# Altium PCB PCB1.PcbDoc
Units mil, origin at the board's own origin, x right, y up, seen from the top; angles counter-clockwise.
Board outline 6830 x 4200 mil, 2 copper layers (Top Layer, Bottom Layer); 64 components, 50 nets, 169 pads, 13 vias.
Unrouted connection lines stored in the file: 2.
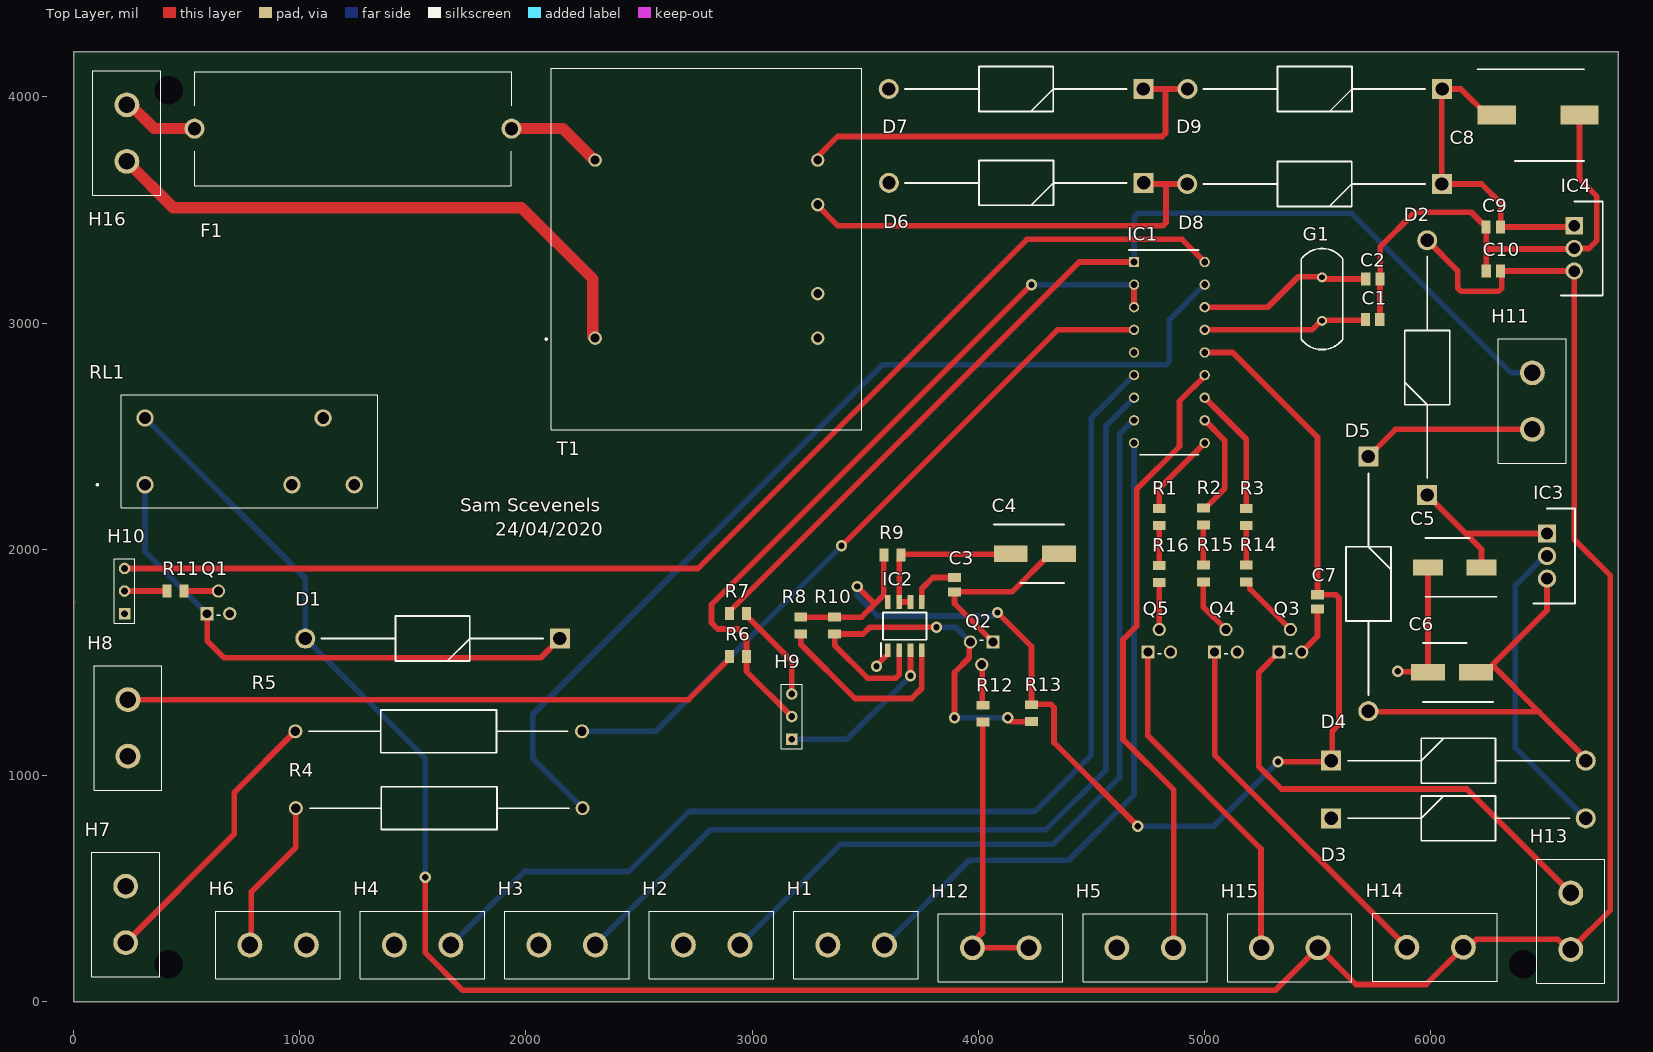
[diagram p0: Top Layer view]
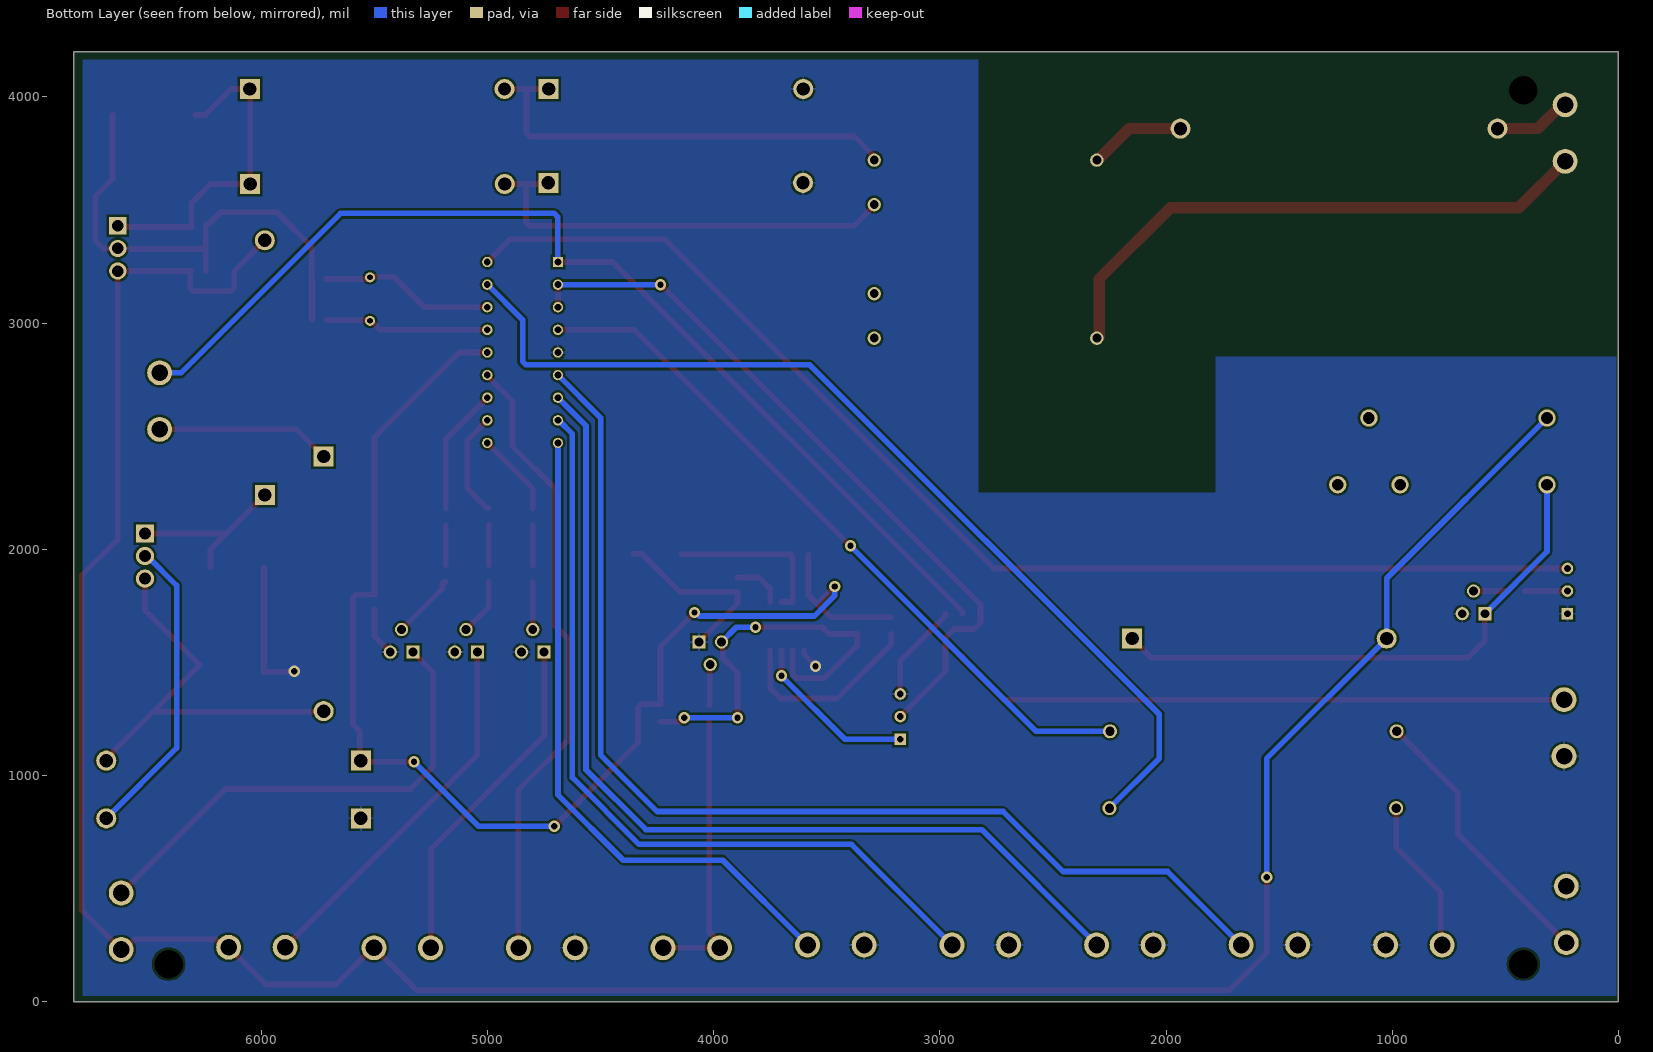
[diagram p1: Bottom Layer view, seen from below]
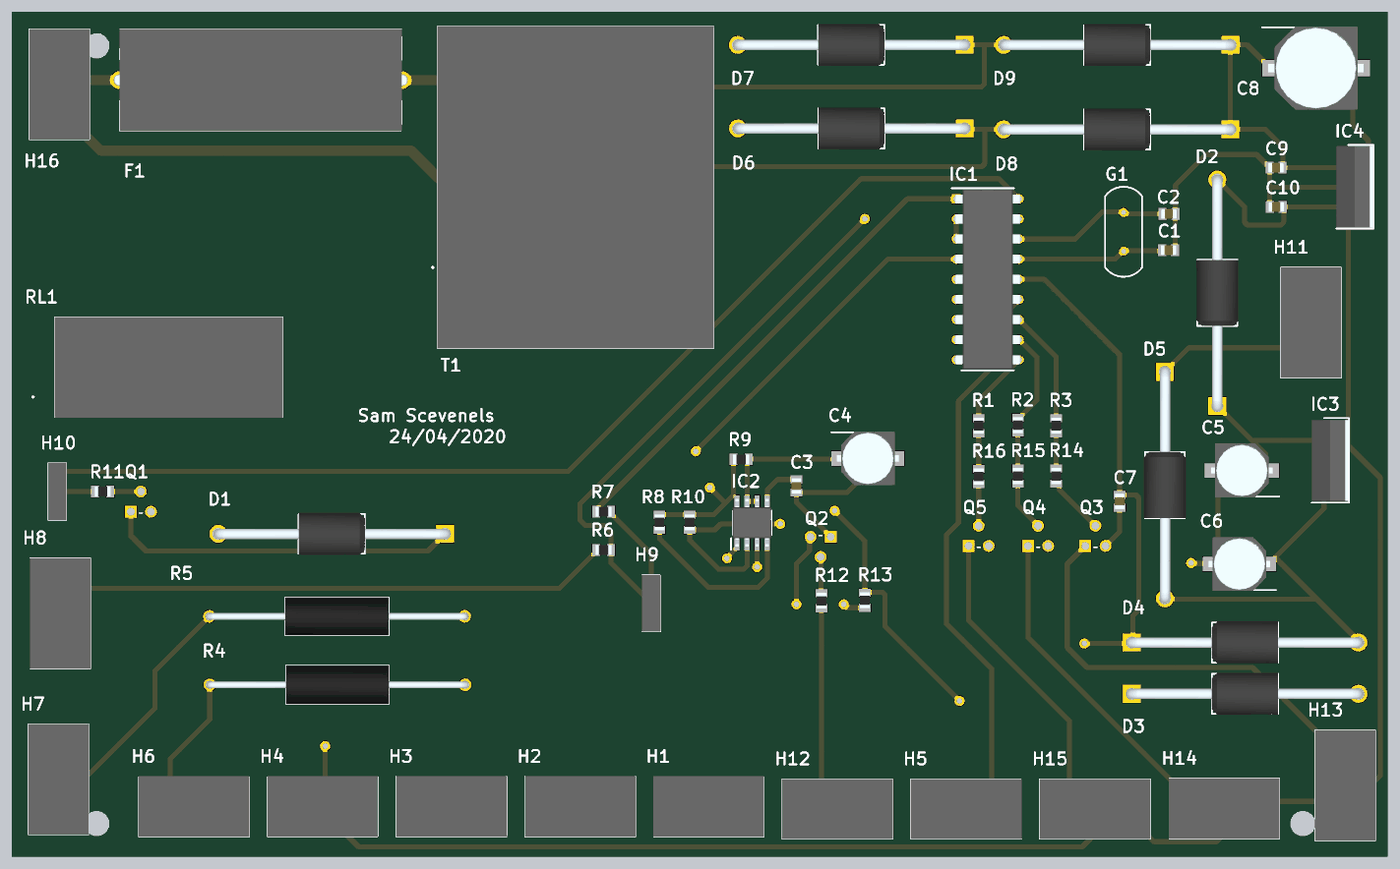
[diagram p2: 3D render of the assembled board from above, using the file's embedded part models]

## Layer stack, top to bottom
Top Solder: solder mask 0.4, Solder Resist, Dk 3.5
Top Layer: signal copper 1.4
Dielectric 1: dielectric 12.6, FR-4, Dk 4.8
Bottom Layer: signal copper 1.4
Bottom Solder: solder mask 0.4, Solder Resist, Dk 3.5

## Board outline
0,0 6830,0 6830,4200 0,4200

## Design rules (kind name [scope] priority, off if disabled: settings)
Clearance [All] p1: gap=10 ignorepadtopadclearanceinfootprint=FALSE except(0: Arc-Hole Track-Hole SMDPad-Hole THPad-Hole Via-Hole Fill-Hole Poly-Hole Region-Hole Text-Hole)
Height [All] p1: minheight=0 maxheight=10000 prefheight=500
PolygonConnect [All] p1: connectstyle=Relief reliefconductorwidth=10 reliefentries=4 polygonreliefangle="90 Angle" airgapwidth=10
RoutingVias [All] p1: holewidth=28 width=50 viastyle="Through Hole" minholewidth=28 minwidth=50 maxholewidth=28 maxwidth=50
SolderMaskExpansion [All] p1: expansion=4 istentingtop=FALSE
Width [All] p1: maxlimit=50 minlimit=10 preferedwidth=50 bottomlayer_prefwidth=25 minimp=50.000000 maximp=50.000000 favimp=50.000000
29 further rules are at their usual default settings.

## Components (designator, comment, footprint, x,y, rotation, side; value= is the part's Value field where it differs from the comment)
C1 "22pF" CAP_0805 5743.11,3015 r0 top
C2 "22pF" CAP_0805 5745,3195 r0 top
C3 "100pF" CAP_0805 3895,1843.11 r90 top
C4 "47µF" CAPAE660X580N 4250,1980 r0 top
C5 "100µF" CAPAE660X610N 6106.89,1920 r180 top
C6 "47µF" CAPAE660X580N 6095,1455 r180 top
C7 "22pF" CAP_0805 5500,1766.89 r90 top
C8 "470µF" CAPAE1030X1050N 6475,3920 r0 top
C9 "100nF" CAP_0805 6276.89,3425 r0 top
C10 "100nF" CAP_0805 6278.11,3230 r0 top
D1 "BY299" DIODE 2150,1605 r180 top
D2 "BY299" DIODE 5985,2240 r90 top
D3 "BY299" DIODE 5560,810 r0 top
D4 "BY299" DIODE 5560,1065 r0 top
D5 "BY299" DIODE 5725,2410 r270 top
D6 "BY299" DIODE 4730.98,3620 r180 top
D7 "BY299" DIODE 4730,4035 r180 top
D8 "BY299" DIODE 6050,3615 r180 top
D9 "BY299" DIODE 6050.98,4035 r180 top
F1 "32mm fuse" FUSE 1235,3860 r0 top
G1 "20Mhz Oscillator" FOXSLF/200-20 5520,3106.06 r270 top
H1 "SW3" 2PINHEADER 3585,250 r180 top
H2 "SW2" 2PINHEADER 2946,250 r180 top
H3 "SW1" 2PINHEADER 2307,250 r180 top
H4 "SW4" 2PINHEADER 1668,250 r180 top
H5 "SW5" 2PINHEADER 4613,237.5 r0 top
H6 "Red Led" 2PINHEADER 1029,250 r180 top
H7 "Yellow Led" 2PINHEADER 230,260 r90 top
H8 "Hearthbeat Led" 2PINHEADER 240,1335 r270 top
H9 "SW7" 3PINHEADER 3175,1160 r90 top
H10 "SW8" 3PINHEADER 225,1715 r90 top
H11 "SW6" 2PINHEADER 6450,2530 r90 top
H12 "Pulse in" 2PINHEADER 4224,237.5 r180 top
H13 "Seconds" 2PINHEADER 6620,480 r270 top
H14 "Seconds" 2PINHEADER 5895,240 r0 top
H15 "Seconds" 2PINHEADER 5252,237.5 r0 top
H16 "Power Plug" 2PINHEADER 235,3715 r90 top
IC1 "PIC16F628A-I_P" DIP794W56P254L2280H432Q18N 4845,2870 r0 top
IC2 "ICM7555CBAZ" ICM7555 3675,1660 r90 top
IC3 "LM7805ACT" TO254P470X1016X2019-3P 6515,2069.61 r270 top
IC4 "LM7812CT" TO254P470X1028X1955-3P 6635,3430 r270 top
Q1 "BC548B" TO127P254X732-3 690,1815 r0 top
Q2 "MPSA14" TO127P254X732-3 3965,1490 r180 top
Q3 "BC548B" TO127P254X732-3 5430,1645 r0 top
Q4 "BC548B" TO127P254X732-3 5145,1645 r0 top
Q5 "BC548B" TO127P254X732-3 4850,1645 r0 top
R1 "4.7K" RES_0805 4800,2142.4 r270 top
R2 "4.7K" RES_0805 4995,2145 r270 top
R3 "4.7K" RES_0805 5185,2142.4 r270 top
R4 "500" "AXIAL RES" 2250,855 r180 top
R5 "500" "AXIAL RES" 980,1195 r0 top
R6 "1K" RES_0805 2937.6,1525 r0 top
R7 "4.7K" RES_0805 2937.6,1715 r180 top
R8 "10K" RES_0805 3215,1662.4 r90 top
R9 "1K" RES_0805 3620,1975 r180 top
R10 "10K" RES_0805 3365,1662.4 r90 top
R11 "1K" RES_0805 450,1815 r180 top
R12 "1K" RES_0805 4020,1272.6 r90 top
R13 "10K" RES_0805 4235,1275 r270 top
R14 "10K" RES_0805 5185,1892.6 r270 top
R15 "10K" RES_0805 4995,1892.4 r270 top
R16 "10K" RES_0805 4800,1890 r270 top
RL1 "G2R-1_24DC" G2R124DC 315.39,2285 r0 top
T1 "44204" 44204 2305.75,2933.15 r90 top

## Footprints (in the part's own frame and the unit in brackets; to place one, negate y for a bottom-side part, rotate by r counter-clockwise, add the part's x,y. Pads: shape width x height; smd on the part's side, far side on the other; paste and mask are expansions set on the pad)
2PINHEADER [mm]
  round 2.79 hole 1.86: 1(0,0) 2(6.35,0)
  silkscreen extent -3.81,-3.81 10.16,3.81, body extent -3.81,-3.81 10.16,3.81, height 14.32
3PINHEADER [mm]
  rect 1.303x1.303 hole 0.76: 1(0,0)
  round 1.303 hole 0.76: 2(2.54,0) 3(5.08,0)
  silkscreen extent -1.06,-1.17 6.14,1.17, body extent -1.06,-1.17 6.14,1.17, height 8.23
44204 [mm]
  round 1.5 hole 1: 1(0,0) 5(20,0) 6(20,-25) 7(15,-25) 9(5,-25) 10(0,-25)
  silkscreen extent -10.3,-29.95 30.3,5.6, body extent -10.3,-29.95 30.3,4.95, height 28.2
"AXIAL RES" [mm]
  round 1.575 hole 1.05: 1(0,0) 2(32.2,0)
  silkscreen extent 1.52,-2.4 30.61,2.4, body extent -0.41,-2.4 32.61,2.4, height 4.8
CAP_0805 [mm]
  rect 1.02x1.47 smd: 1(-0.81,0) 2(0.81,0)
  body extent -1,-0.63 1,0.63, height 0.94
CAPAE660X580N [mm]
  rect 3.8x1.85 smd: 1(-2.7,0) 2(2.7,0)
  silkscreen extent -4.6,-3.3 3.3,3.3, body extent -3.9,-3.4 3.9,3.4, height 5.8
CAPAE660X610N [mm]
  rect 3.4x1.8 smd: 1(-3,0) 2(3,0)
  silkscreen extent -4.7,-3.3 3.3,3.3, body extent -3.9,-3.4 3.9,3.4, height 6.1
CAPAE1030X1050N [mm]
  rect 4.3x2.1 smd: 1(-4.65,0) 2(4.65,0)
  silkscreen extent -6.8,-5.15 5.15,5.15, body extent -6,-5.25 6,5.25, height 10.5
DIODE [mm]
  rect 2.25x2.25 hole 1.5: 1(0,0)
  round 2.25 hole 1.5: 2(28.6,0)
  silkscreen extent 1.89,-2.52 26.8,2.52, body extent -0.64,-2.65 29.2,2.65, height 5.3
DIP794W56P254L2280H432Q18N [mm]
  rect 1.16x1.16 hole 0.76: 1(-3.97,10.16)
  round 1.16 hole 0.76: 2(-3.97,7.62) 3(-3.97,5.08) 4(-3.97,2.54) 5(-3.97,0) 6(-3.97,-2.54) 7(-3.97,-5.08) 8(-3.97,-7.62) 9(-3.97,-10.16) 10(3.97,-10.16) 11(3.97,-7.62) 12(3.97,-5.08) 13(3.97,-2.54) 14(3.97,0) 15(3.97,2.54) 16(3.97,5.08) 17(3.97,7.62) 18(3.97,10.16)
  silkscreen extent -4.55,-11.5 3.3,11.5, body extent -4.11,-11.4 4.11,11.4, height 4.32
FOXSLF/200-20 [mm]
  round 1.13 hole 0.63: 1(-2.44,0) 2(2.44,0)
  silkscreen extent -5.68,-2.33 5.68,2.33
FUSE [mm]
  round 2.25 hole 1.5: 1(-17.8,0) 2(17.8,0)
  silkscreen extent -17.8,-6.4 17.8,6.4, body extent -18.44,-6.4 18.45,6.4, height 13.1
G2R124DC [mm]
  round 1.95 hole 1.3: 1(0,0) 2(16.5,0) 3(23.5,0) 4(20,7.5) 5(0,7.5)
  silkscreen extent -5.45,-2.6 26.15,10.1, body extent -2.65,-2.6 26.15,10.1, height 25.6
ICM7555 [mm]
  rect 1.525x0.65 smd: 1(-2.712,1.905) 2(-2.712,0.635) 3(-2.712,-0.635) 4(-2.712,-1.905) 5(2.712,-1.905) 6(2.712,-0.635) 7(2.712,0.635) 8(2.712,1.905)
  silkscreen extent -3.43,-2.45 1.52,2.67, body extent -3,-2.45 3,2.45, height 1.75
RES_0805 [mm]
  rect 1x1.45 smd: 1(-0.95,0) 2(0.95,0)
  body extent -1,-0.63 1,0.63, height 0.65
TO127P254X732-3 [mil]
  rect 58.5x58.5 hole 39: 1(-100,-100)
  round 58.5 hole 39: 2(-50,0) 3(0,-100)
  silkscreen extent -57,-107 -42,-107
TO254P470X1016X2019-3P [mm]
  rect 2.055x2.055 hole 1.37: 1(0,0)
  round 2.055 hole 1.37: 2(2.535,0) 3(5.07,0)
  silkscreen extent -2.8,-1.55 7.87,3.15, body extent -2.55,-1.55 7.61,3.15, height 18.54
TO254P470X1028X1955-3P [mm]
  rect 1.935x1.935 hole 1.29: 1(0,0)
  round 1.935 hole 1.29: 2(2.54,0) 3(5.08,0)
  silkscreen extent -2.73,-1.5 7.81,3.2, body extent -2.6,-1.5 7.68,3.2, height 18.66

## Part data
C1 C2 C3 C7 C9 C10: library part 08055A101JAT2A, "Capacitor", Manufacturer_Name=AVX, Mouser Part Number=581-08055A101J, RS Part Number=0391000P, Allied Price/Stock=https://www.alliedelec.com/avx-08055a101jat2a/70474488/, Allied_Number=70474488, Datasheet Link=https://componentsearchengine.com/Datasheets/1/06031A100FAT2A.pdf, Height=0.94mm, Manufacturer_Part_Number=08055A101JAT2A, Mouser Price/Stock=https://www.mouser.com/Search/Refine.aspx?Keyword=581-08055A101J, RS Price/Stock=http://uk.rs-online.com/web/p/products/0391000P
C4 C6: library part CS1H220M-CRE54, "Capacitor Polarised", Manufacturer_Name=ST(Semtech), Datasheet Link=https://datasheet.lcsc.com/szlcsc/1809042041_ST-Semtech-CS1H220M-CRE54_C98744.pdf, Height=5.8mm, Manufacturer_Part_Number=CS1H220M-CRE54
C5: library part EEE-FT1V101AP, "Capacitor Polarised", Manufacturer_Name=Panasonic, Mouser Part Number=667-EEE-FT1V101AP, Allied Price/Stock=https://www.alliedelec.com/panasonic-eee-ft1v101ap/70258385/, Allied_Number=70258385, Datasheet Link=https://industrial.panasonic.com/cdbs/www-data/pdf/RDE0000/ABA0000C1240.pdf, Height=6.1mm, Manufacturer_Part_Number=EEE-FT1V101AP, Mouser Price/Stock=https://www.mouser.com/Search/Refine.aspx?Keyword=667-EEE-FT1V101AP
C8: library part EEE-FT1E102UP, "Capacitor Polarised", Manufacturer_Name=Panasonic, Mouser Part Number=667-EEE-FT1E102UP, Datasheet Link=https://componentsearchengine.com/Datasheets/1/EEE-FT1E102UP.pdf, Height=10.5mm, Manufacturer_Part_Number=EEE-FT1E102UP, Mouser Price/Stock=https://www.mouser.com/Search/Refine.aspx?Keyword=667-EEE-FT1E102UP
D1 D2 D3 D4 D5 D6 D7 D8 D9: "Diode", Manufacturer_Name=MULTICOMP, Datasheet Link=https://componentsearchengine.com/Datasheets/2/BY299.pdf, Manufacturer_Part_Number=BY299
F1: library part 03540101ZXGY, "Undefined or Miscellaneous", Manufacturer_Name=LITTELFUSE, Mouser Part Number=576-03540101ZXGY, Datasheet Link=http://m.littelfuse.com/~/media/electronics/datasheets/fuse_blocks/littelfuse_fuse_block_354_datasheet.pdf.pdf, Height=13mm, Manufacturer_Part_Number=03540101ZXGY, Mouser Price/Stock=https://www.mouser.com/Search/Refine.aspx?Keyword=576-03540101ZXGY
G1: library part FOXSLF_200-20, "Crystal or Oscillator", Manufacturer_Name=Fox, Manufacturer_Part_Number=FOXSLF/200-20, Mouser Part Number=559-FOXS200-20-LF, RS Part Number=5476317P, Allied Price/Stock=https://www.alliedelec.com/fox-electronics-foxslf-200-20/70025550/, Allied_Number=70025550, Datasheet Link=http://www.farnell.com/datasheets/1911270.pdf, Mouser Price/Stock=https://www.mouser.com/Search/Refine.aspx?Keyword=559-FOXS200-20-LF, RS Price/Stock=http://uk.rs-online.com/web/p/products/5476317P
H1 H2 H3 H4 H5 H6 H7 H8 H11 H12 H13 H14 H15 H16: library part 0010845020, "Connector", Manufacturer_Name=Molex, Mouser Part Number=N/A, Datasheet Link=https://www.mouser.com/datasheet/2/276/0010845020_PCB_HEADERS-247555.pdf, Height=14.22mm, Manufacturer_Part_Number=0010845020, Mouser Price/Stock=https://www.mouser.com/Search/Refine.aspx?Keyword=N%2FA
H9 H10: library part 5-146278-3, "Connector", Manufacturer_Name="TE Connectivity", Mouser Part Number=571-5-146278-3, RS Part Number=7829195, Allied Price/Stock=https://www.alliedelec.com/teconnectivity-5-146278-3/70042446/, Allied_Number=70042446, Datasheet Link=https://www.mouser.com/datasheet/2/418/NG_CD_146278_H1-1238585.pdf, Height=8.13mm, Manufacturer_Part_Number=5-146278-3, Mouser Price/Stock=https://www.mouser.com/Search/Refine.aspx?Keyword=571-5-146278-3, RS Price/Stock=https://uk.rs-online.com/web/p/products/7829195
IC1: "Integrated Circuit", Manufacturer_Name=Microchip, Manufacturer_Part_Number=PIC16F628A-I/P, Mouser Part Number=579-PIC16F628A-I/P, RS Part Number=1214233P, Datasheet Link=http://docs-emea.rs-online.com/webdocs/1382/0900766b8138209a.pdf, Height=4.32mm, Mouser Price/Stock=https://www.mouser.com/Search/Refine.aspx?Keyword=579-PIC16F628A-I%2FP, RS Price/Stock=http://uk.rs-online.com/web/p/products/1214233P
IC2: "Integrated Circuit", Manufacturer_Name="Renesas Electronics", Datasheet Link=http://www.intersil.com/content/dam/Intersil/documents/icm7/icm7555-56.pdf, Height=1.75mm, Manufacturer_Part_Number=ICM7555CBAZ
IC3: "Integrated Circuit", Manufacturer_Name="ON Semiconductor", Mouser Part Number=512-LM7805ACT, RS Part Number=8062839, Datasheet Link=https://componentsearchengine.com/Datasheets/2/LM7805ACT.pdf, Height=4.7mm, Manufacturer_Part_Number=LM7805ACT, Mouser Price/Stock=https://www.mouser.com/Search/Refine.aspx?Keyword=512-LM7805ACT, RS Price/Stock=http://uk.rs-online.com/web/p/products/8062839
IC4: "Integrated Circuit", Manufacturer_Name="Texas Instruments", Mouser Part Number=926-LM7812CT, RS Part Number=0648438A, Datasheet Link=http://www.ti.com/lit/ds/symlink/lm7800.pdf, Height=4.7mm, Manufacturer_Part_Number=LM7812CT, Mouser Price/Stock=https://www.mouser.com/Search/Refine.aspx?Keyword=926-LM7812CT, RS Price/Stock=http://uk.rs-online.com/web/p/products/0648438A
Q1 Q3 Q4 Q5: "Undefined or Miscellaneous", Manufacturer_Name="ON Semiconductor", Mouser Part Number=512-BC548B, RS Part Number=4379568, Datasheet Link=http://componentsearchengine.com/Datasheets/1/BC548B.pdf, Manufacturer_Part_Number=BC548B, Mouser Price/Stock=http://www.mouser.com/Search/ProductDetail.aspx?qs=ljbEvF4DwOPrhFN8FYf3cw%3d%3d, RS Price/Stock=http://uk.rs-online.com/web/p/products/4379568
Q2: "Transistor Darlington Pair", Manufacturer_Name="Central Semiconductor", Mouser Part Number=610-MPSA14, Datasheet Link=https://my.centralsemi.com/get_document.php?cmp=1&mergetype=pd&mergepath=pd&pdf_id=MPSA12-14.PDF, Manufacturer_Part_Number=MPSA14, Mouser Price/Stock=https://www.mouser.com/Search/Refine.aspx?Keyword=610-MPSA14
R1 R2 R3 R4 R5 R6 R7 R8 R9 R10 R11 R12 R13 R14 R15 R16: library part CPF0805B100KE, "Resistor", Manufacturer_Name="TE Connectivity", Mouser Part Number=279-CPF0805B100KE, RS Part Number=6662673P, Allied Price/Stock=https://www.alliedelec.com/te-connectivity-cpf0805b100ke/70286772/, Allied_Number=70286772, Datasheet Link=http://docs-europe.electrocomponents.com/webdocs/13d1/0900766b813d116f.pdf, Height=0.65mm, Manufacturer_Part_Number=CPF0805B100KE, Mouser Price/Stock=https://www.mouser.com/Search/Refine.aspx?Keyword=279-CPF0805B100KE, RS Price/Stock=http://uk.rs-online.com/web/p/products/6662673P
RL1: "Relay or Contactor", Manufacturer_Name="Omron Electronics", Manufacturer_Part_Number="G2R-1 24DC", RS Part Number=0366265, Datasheet Link="https://componentsearchengine.com/Datasheets/2/G2R-1 24DC.pdf", Height=25.5mm, RS Price/Stock=http://uk.rs-online.com/web/p/products/0366265
T1: "Transformer", Manufacturer_Name=MYRRA, RS Part Number=1739917, Datasheet Link=https://componentsearchengine.com/Datasheets/2/44204.pdf, Height=28.1mm, Manufacturer_Part_Number=44204, RS Price/Stock=http://uk.rs-online.com/web/p/products/1739917

## Free pads (board coordinates)
  round 0 hole 125.98 unplated: 4(420,165) 4(420,4030) 4(6410,165)

## Via types
v1: diameter 50, hole 28, Top Layer to Bottom Layer, 13 vias

## Nets (pads, with @x,y where several pads share a name; then routed paths per layer and width w, separated by ;. In a path a pad name is that pad's centre, name@x,y a point inside that pad or via, vN(x,y) a via of type N, cw(c..) or ccw(c..) an arc to the next point about the centre after c; other vN are vias at no path point)
GND: C1.2 C2.2 C3.1 C4.2 C5.2 C6.2 C7.1 C8.2 C9.1 C10.1 D3.1 D6.2 D7.2 H1.2 H2.2 H3.2 H4.2 H5.1 H6.1 H7.2 H8.2 H9.3 H10.1 IC1.5 IC2.1 IC4.2 Q1.3 Q2.1 Q3.3 Q4.3 Q5.3 R7.1 | length 4345
  Top Layer w25: R7.1 2975,1706.14 3175,1506.14 H9.3 ; v1(3550,1483) 3550,1486 3600,1536 IC2.1 ; Q2.1 3895,1760 C3.1 4149.13,1811.22 4317.91,1980 C4.2 ; Q3.3 5500,1615 C7.1 ; C1.2 5775.94,3015.94 5775.94,3194.06 C2.2 5776.89,3336.89 5930,3490 6180,3490 6228.56,3441.44 6237.42,3441.44 6245,3433.86 C9.1 6245.61,3424.39 6245.61,3327.5 ; v1(5855,1460) 5857.5,1457.5 5986.2,1457.5 C6.2 5988.7,1919.92 C5.2 ; C10.1 6245.61,3230.61 6245.61,3327.5 ; C8.2 6658.07,3636.93 6735,3560 6735,3365 6700,3330 IC4.2 6632.5,3327.5 6245.61,3327.5
NetC1_1: C1.1 G1.2 IC1.15 | length 728.6
  Top Layer w25: IC1.15 5475.51,2970 5518.01,3012.5 5708.72,3012.5 C1.1
NetC2_1: C2.1 G1.1 IC1.16 | length 771.9
  Top Layer w25: IC1.16 5280,3070 5415,3205 5517.13,3205 G1.1 5525.27,3202.13 5532.4,3195 C2.1
NetC3_2: C3.2 IC2.5 | length 223.9
  Top Layer w25: IC2.5 3750,1825 3800,1875 C3.2
NetC4_1: C4.1 IC2.6 IC2.7 R9.1 | length 749.7
  Top Layer w25: IC2.6 IC2.7 3650,1958.74 3657.4,1966.14 R9.1 3659.9,1977.5 4141.2,1977.5 C4.1
NetC5_1: C5.1 D2.1 IC3.1 | length 779
  Top Layer w25: D2.1 6155.39,2069.61 ; C5.1 6225,2000 6155.39,2069.61 ; IC3.1 6155.39,2069.61
NetC6_1: C6.1 D4.2 D5.2 IC3.3 | length 1832.3
  Top Layer w25: D5.2 5728.18,1280.84 6479.16,1280.84 ; IC3.3 6515,1730.31 6272.34,1487.66 6479.16,1280.84 ; D4.2 6685.98,1074.02 6479.16,1280.84
NetC7_2: C7.2 D4.1 IC1.14 IC2.8 R8.2 R9.2 R10.2 R13.1 | length 5812.6
  Top Layer w25: R8.2@3214.9,1699.71 R8.2 R10.2 3483.47,1699.8 3541.83,1758.17 ; v1(3465,1835) 3541.83,1758.17 ; R9.2 3582.6,1798.94 3541.83,1758.17 ; v1(4085,1720) 4235,1570 R13.1 4237.6,1315 4320.36,1315 4335,1300.36 4335,1145 v1(4705,775) ; IC1.14 5125,2870 5500,2495 C7.2 5580.36,1798.78 5595,1784.14 5595,1225 5565,1195 5565,1070 D4.1 5555,1060 v1(5325,1060)
  Bottom Layer w25: v1(3465,1835) 3465,1795 3555,1705 4063.24,1705 4078.24,1720 v1(4085,1720) ; v1(4705,775) 5040,775 v1(5325,1060)
NetC8_1: C8.1 C9.2 D8.1 D9.1 IC4.1 | length 1438
  Top Layer w25: C8.1 6248.62,3920 6133.62,4035 D9.1 6050,4034.02 D8.1 6225,3615 6310,3530 6310,3426.22 C9.2 6630,3425 IC4.1
NetC10_2: C10.2 D1.2 D2.2 H13.2 H14.2 H15.2 IC4.3 pad.4@6410,165 RL1.5 | length 12274.1
  Top Layer w25: v1(1555,550) 1555,215 1720,50 5314.5,50 H15.2 5507.5,237.5 5670,75 5980,75 H14.2 6167.07,240 6202.07,275 6562.93,275 6607.93,230 H13.2 6795,405 6795,1883.08 6635,2043.08 IC4.3 C10.2 6315,3225 6315,3154.64 6300.36,3140 6134.64,3140 6120,3154.64 6120,3230.98 D2.2
  Bottom Layer w25: RL1.5 1024.02,1871.65 D1.2 1555,1074.02 v1(1555,550)
NetD1_1: D1.1 Q1.1 RL1.1 | length 2430
  Top Layer w25: Q1.1 590,1595 665,1520 2065,1520 D1.1
  Bottom Layer w25: RL1.1 315.39,1989.61 Q1.1
NetD3_2: D3.2 IC3.2 | length 1352.6
  Bottom Layer w25: IC3.2 6504.8,1969.8 6375,1840 6375,1120.98 D3.2
NetD5_1: D5.1 H11.1 | length 774.7
  Top Layer w25: D5.1 5845,2530 H11.1
NetD6_1: D6.1 D8.2 T1.7 | length 1962.9
  Top Layer w25: T1.7@3280,3530 3380,3430 4815.36,3430 4830,3444.64 4830,3615 ; D6.1 4735.98,3615 4830,3615 ; D8.2 4830,3615
NetD7_1: D7.1 D9.2 T1.6 | length 1984.6
  Top Layer w25: T1.6@3280,3726.85 3378.15,3825 4812.86,3825 4827.5,3839.64 4827.5,4035 ; D7.1 4827.5,4035 ; D9.2 4827.5,4035
NetF1_1: F1.1 H16.2 pad.4@420,4030 | length 342.7
  Top Layer w50: H16.2 251.19,3965 356.19,3860 F1.1
NetF1_2: F1.2 T1.5 | length 415.1
  Top Layer w50: F1.2 2162.6,3860 T1.5@2295.75,3726.85
NetH1_1: H1.1 IC1.9 | length 2934.9
  Bottom Layer w25: H1.1 3960,625 4400,625 4688.7,913.7 IC1.9
NetH2_1: H2.1 IC1.8 | length 3594.1
  Bottom Layer w25: H2.1 3391,695 4330,695 4625,990 4625,2510 4685,2570 IC1.8
NetH3_1: H3.1 IC1.7 | length 4276.4
  Bottom Layer w25: H3.1 2307,252 2815,760 4300,760 4565,1025 4565,2546.3 IC1.7
NetH4_1: H4.1 IC1.6 | length 4938.1
  Bottom Layer w25: H4.1 1993,575 2455,575 2720,840 4250,840 4500,1090 4500,2581.3 IC1.6
NetH5_2: H5.2 IC1.13 | length 2776.2
  Top Layer w25: H5.2 4865,239.5 4865,935 4640,1160 4640,1600 4700,1660 4700,2265 4890,2455 4890,2655 5001.3,2766.3 IC1.13
NetH6_2: H6.2 R4.2 | length 689.2
  Top Layer w25: H6.2 785,256 785,485 982.28,682.28 R4.2
NetH7_1: H7.1 R5.1 | length 1245.7
  Top Layer w25: H7.1 710,740 710,925 R5.1
NetH8_1: H8.1 R6.1 | length 2744.1
  Top Layer w25: H8.1 2719.05,1335 2900.2,1516.14 R6.1
NetH9_1: H9.1 IC2.3 | length 754.2
  Top Layer w25: v1(3700,1440) IC2.3
  Bottom Layer w25: H9.1 3420,1160 v1(3700,1440)
NetH9_2: H9.2 IC1.2 IC1.3 R6.2 | length 3249.3
  Top Layer w25: H9.2 2975,1460 R6.2 2975,1610 2937.5,1647.5 2847.5,1647.5 2820.36,1674.64 2820.36,1755.36 v1(4235,3170) ; IC1.3 IC1.2
  Bottom Layer w25: v1(4235,3170) IC1.2
NetH10_2: H10.2 R11.2 | length 187.6
  Top Layer w25: H10.2 R11.2
NetH10_3: H10.3 IC1.18 | length 5420.4
  Top Layer w25: H10.3 2760,1915 4215,3370 4901.3,3370 IC1.18
NetH11_2: H11.2 IC1.1 R7.2 | length 4696.8
  Top Layer w25: R7.2 2900.2,1723.86 4446.34,3270 IC1.1
  Bottom Layer w25: IC1.1 4690,3271.3 4690,3470.36 4704.64,3485 5650,3485 6355,2780 H11.2
NetH12_1: H12.1 H12.2 R12.1 | length 1266.7
  Top Layer w25: R12.1 4020,306.46 3974,260.46 H12.2 H12.1
NetH13_1: H13.1 Q3.1 | length 2154.2
  Top Layer w25: Q3.1 5240,1455 5240,1040 5340,940 6160,940 H13.1
NetH14_1: H14.1 Q4.1 | length 1657.1
  Top Layer w25: Q4.1 5045,1090 H14.1
NetH15_1: H15.1 Q5.1 | length 1515.4
  Top Layer w25: Q5.1 4750,1175 5250,675 5250,239.5 H15.1
NetH16_1: H16.1 T1.1 | length 2531.3
  Top Layer w50: H16.1 440,3510 1980,3510 2295.75,3194.25 T1.1@2295.75,2939.45
NetIC1_4: IC1.4 R5.2 | length 3176.2
  Top Layer w25: v1(3395,2015) 4350,2970 IC1.4
  Bottom Layer w25: R5.2 2575,1195 v1(3395,2015)
NetIC1_10: IC1.10 R1.1 | length 373.6
  Top Layer w25: R1.1 4800,2268.7 IC1.10
NetIC1_11: IC1.11 R2.1 | length 468.9
  Top Layer w25: R2.1 5003.86,2182.4 5090,2268.54 5090,2481.3 IC1.11
NetIC1_12: IC1.12 R3.1 | length 566.3
  Top Layer w25: IC1.12 5185,2486.3 R3.1
NetIC1_17: IC1.17 R4.1 | length 4372.8
  Bottom Layer w25: R4.1 2030,1075 2030,1270 3575.33,2815.33 4830.36,2815.33 4845,2829.98 4845,3015 5000,3170 IC1.17
NetIC2_2: IC2.2 Q2.3 R10.1 R13.2 | length 1860.3
  Top Layer w25: IC2.2 3650,1444.64 3635.36,1430 3510,1430 3365,1575 R10.1 3490,1625 3520,1655 v1(3815,1655) ; v1(3895,1255) 3895,1455 3960,1520 3960,1585 Q2.3 ; v1(4130,1254.64) 4147.05,1237.6 R13.2
  Bottom Layer w25: v1(3815,1655) 3900,1655 Q2.3 ; v1(3895,1255) 3895.18,1254.82 4129.82,1254.82 v1(4130,1254.64)
NetIC2_4: IC2.4 R8.1 | length 866.3
  Top Layer w25: R8.1 3215,1580 3455,1340 3705,1340 3750,1385 IC2.4
NetQ1_2: Q1.2 R11.1 | length 152.6
  Top Layer w25: R11.1 Q1.2
NetQ2_2: Q2.2 R12.2 | length 182.1
  Top Layer w25: Q2.2 4017.5,1487.5 4017.5,1312.5 R12.2
NetQ3_2: Q3.2 R14.2 | length 296.2
  Top Layer w25: R14.2 5193.86,1855.2 5201.04,1848.01 5201.04,1823.96 Q3.2
NetQ4_2: Q4.2 R15.2 | length 251.4
  Top Layer w25: R15.2 4995,1745 Q4.2
NetQ5_2: Q5.2 R16.2 | length 207.6
  Top Layer w25: Q5.2 R16.2
NetR1_2: R1.2 R16.1 | length 177.6
  Top Layer w25: R16.1 R1.2
NetR2_2: R2.2 R15.1 | length 177.8
  Top Layer w25: R15.1 R2.2
NetR3_2: R3.2 R14.1 | length 175
  Top Layer w25: R14.1 R3.2
pads on no net: RL1.2 RL1.3 RL1.4 T1.9 T1.10

## Polygon pours and split planes (outlines as drawn)
no net on Top Layer "NONET_L01_P015" (solid, pour order 15): 10,1765
no net on Top Layer "NONET_L01_P014" (solid, pour order 14): 10,1765 7.5,1765
no net on Top Layer "NONET_L01_P012" (solid, pour order 12): 4255,560
no net on Top Layer "NONET_L01_P008" (solid, pour order 8): 805,625
no net on Top Layer "NONET_L01_P007" (solid, pour order 7): 690,0
no net on Top Layer "NONET_L01_P005" (solid, pour order 5): 1045,3335
no net on Top Layer "NONET_L01_P004" (solid, pour order 4): 1010,3270
GND on Bottom Layer "GND_L02_P017" (solid, pour order 17): 1780,2850 1780,2255 1785,2250 2830,2250 2830,4165 6790,4165 6790,25 10,25 10,2850
no net on Board Outline "NONET_L01_P-001" (solid): 0,0 6830,0 6830,4200 0,4200

## Silkscreen, mask and mechanical layers (free items; w line width, h text height)
Top Overlay:
  text "Sam Scevenels" at 1710,2165 h60
  text "24/04/2020" at 1865,2060 h60